# Altium PCB LCD_PCB_LAYOUT.PcbDoc
Units mm, origin at the board's own origin, x right, y up, seen from the top; angles counter-clockwise.
Board outline 80.1 x 67.6 mm, 2 copper layers (Top Layer, Bottom Layer); 26 components, 24 nets, 94 pads, 0 vias.
Unrouted connection lines stored in the file: 8.
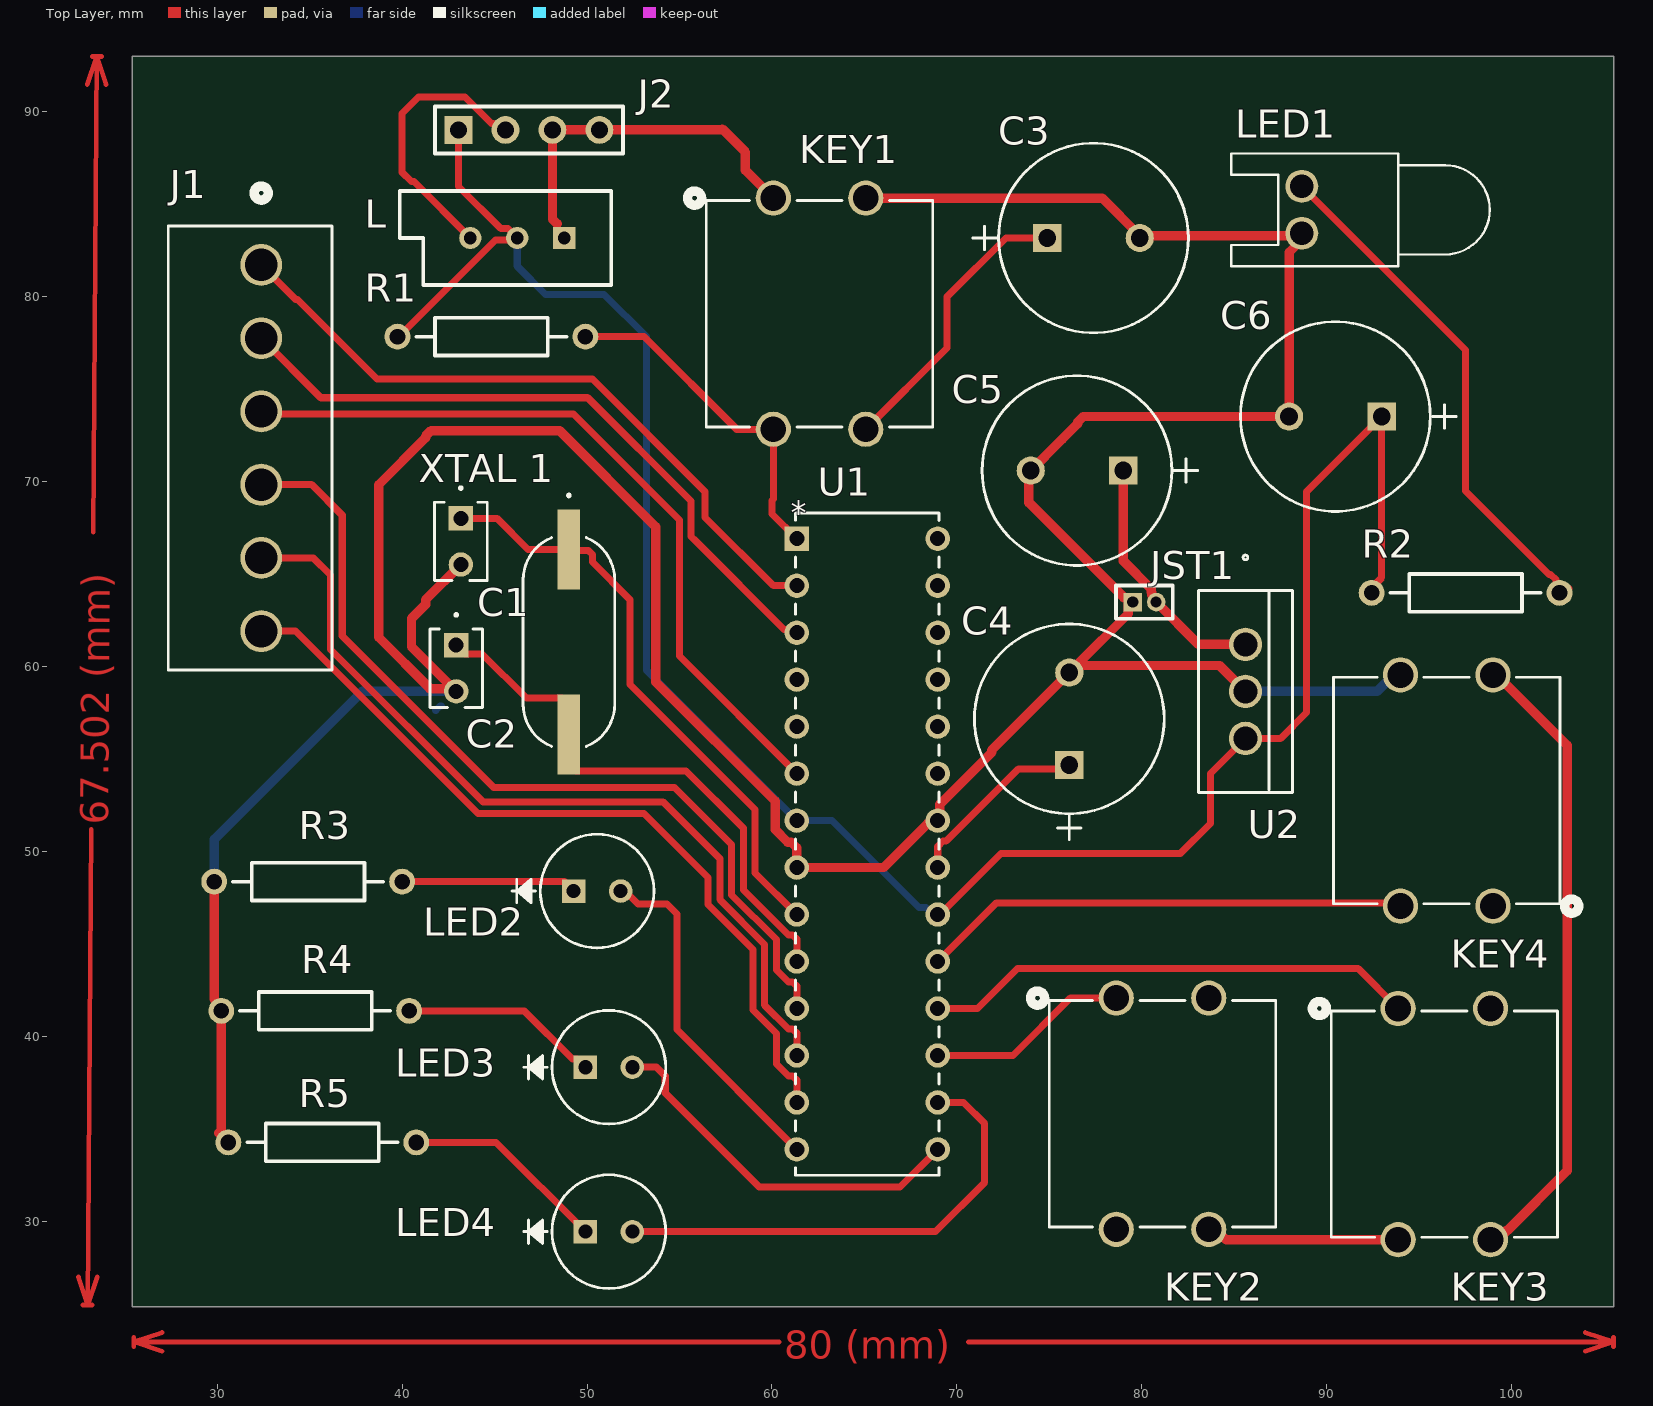
[diagram p0: Top Layer view]
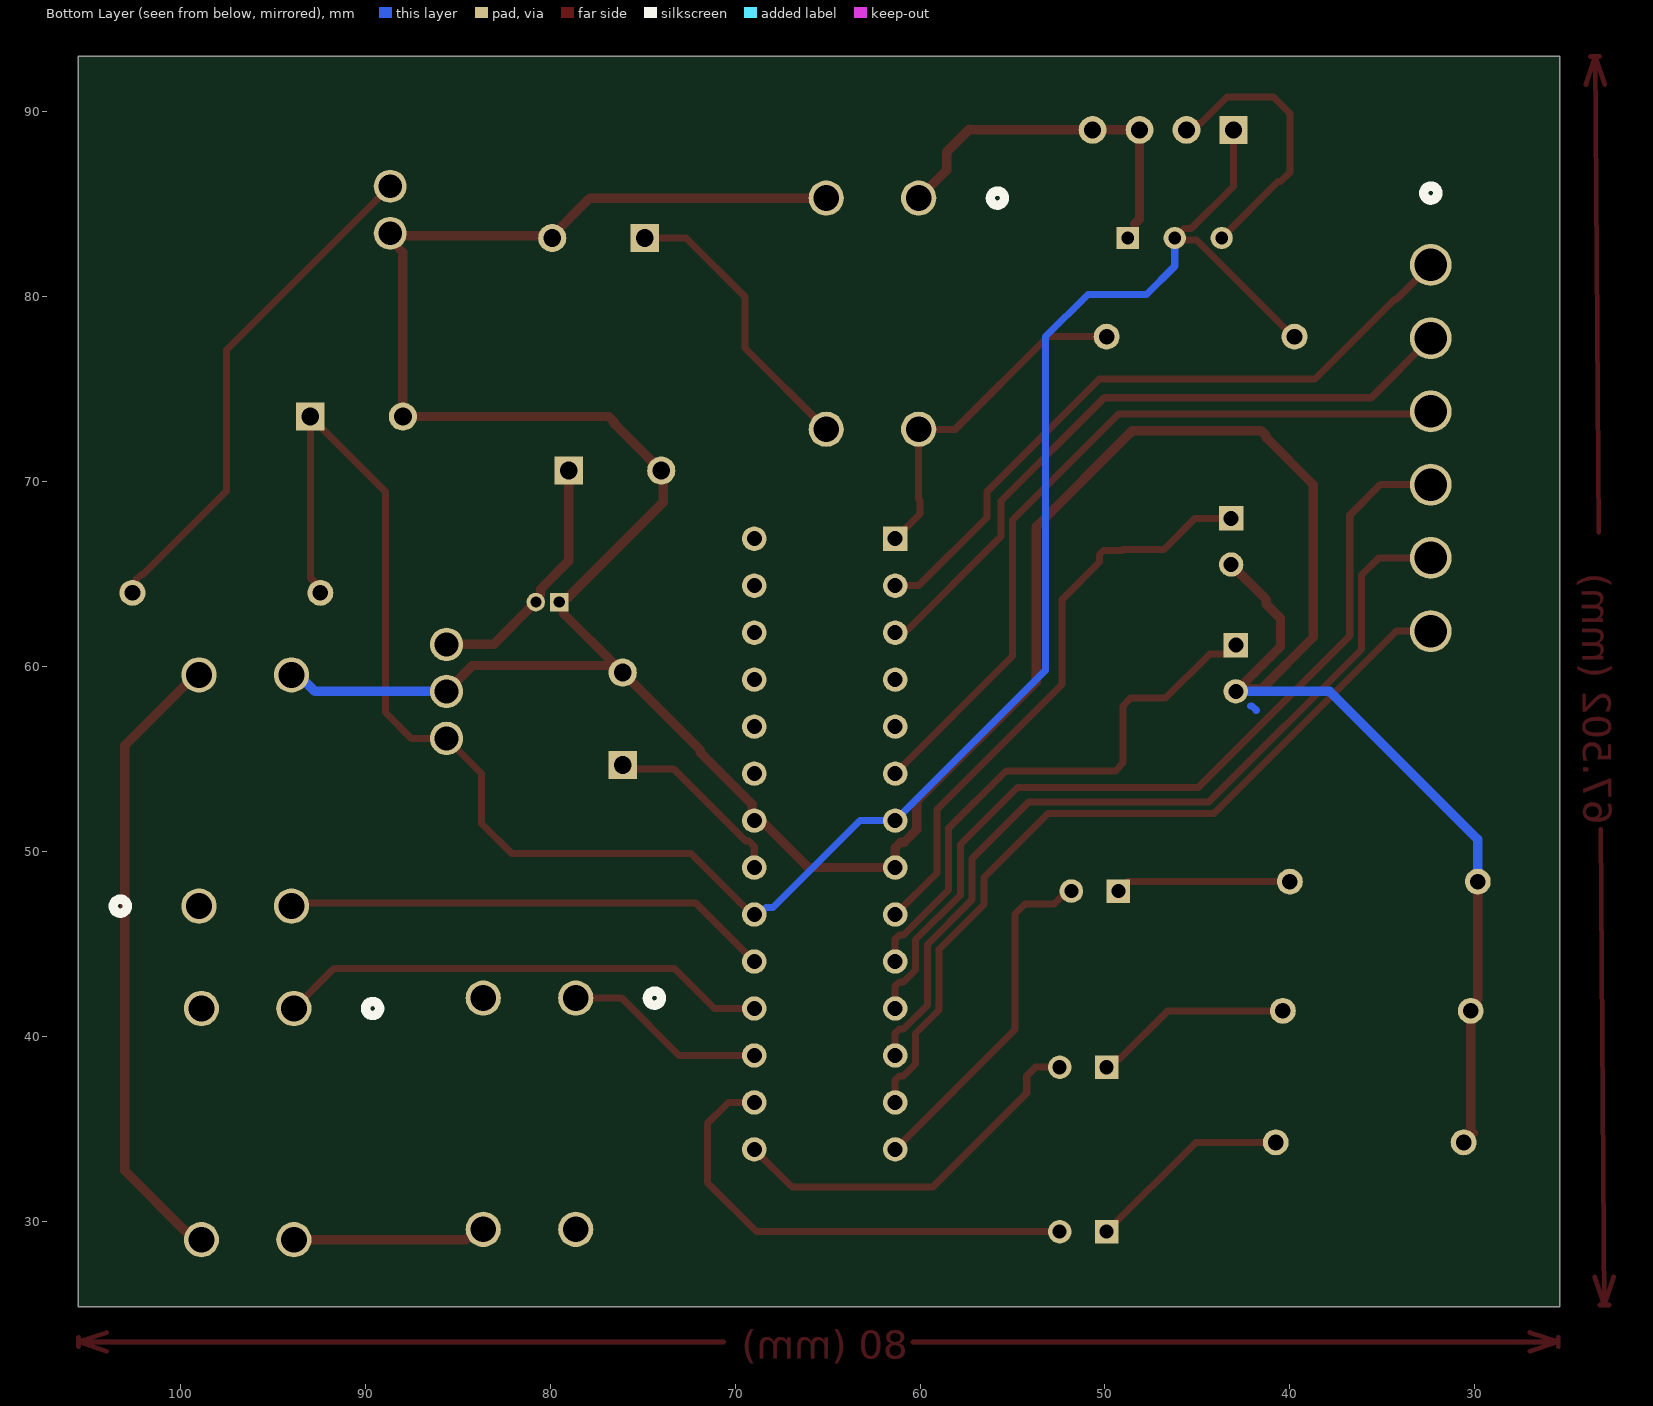
[diagram p1: Bottom Layer view, seen from below]

## Layer stack, top to bottom
Top Solder: solder mask 0.0102, Solder Resist, Dk 3.5
Top Layer: signal copper 0.0356
Dielectric 1: dielectric 0.32, FR-4, Dk 4.8
Bottom Layer: signal copper 0.0356
Bottom Solder: solder mask 0.0102, Solder Resist, Dk 3.5

## Board outline
25.4,25.4 105.5,25.4 105.5,93 25.4,93

## Design rules (kind name [scope] priority, off if disabled: settings)
Clearance [All] p1: gap=0.254 ignorepadtopadclearanceinfootprint=FALSE except(0: Arc-Hole Track-Hole SMDPad-Hole THPad-Hole Via-Hole Fill-Hole Poly-Hole Region-Hole Text-Hole)
PolygonConnect [All] p1: connectstyle=Relief reliefconductorwidth=0.254 reliefentries=4 polygonreliefangle="90 Angle" airgapwidth=0.254
RoutingVias [All] p1: holewidth=0.711 width=1.27 viastyle="Through Hole" minholewidth=0.711 minwidth=1.27 maxholewidth=4 maxwidth=5
SolderMaskExpansion [All] p1: expansion=0.102 istentingtop=FALSE
Width Width_1 [InNet('GND') or InNet('VCC')] p1: maxlimit=0.635 minlimit=0.381 preferedwidth=0.508
Width [All] p2: maxlimit=0.508 minlimit=0.254 preferedwidth=0.381
30 further rules are at their usual default settings.

## Components (designator, comment, footprint, x,y, rotation, side; value= is the part's Value field where it differs from the comment)
C1 "22pF" CAP_K220J15C0GF53L2_VIS 43.18,68.032 r270 top
C2 "22pF" CAP_K220J15C0GF53L2_VIS 42.926,61.174 r270 top
C3 "100nF" PCAP_10x16_PAN 74.879,83.185 r0 top
C4 "100nF" PCAP_10x16_PAN 76.073,54.686 r90 top
C5 "330nF" PCAP_10x16_PAN 78.994,70.612 r180 top
C6 "100nF" PCAP_10x16_PAN 92.964,73.533 r180 top
J1 "6 pin female connector" CONN6_1744055-6 32.385,81.73 r270 top
J2 "4 pin connector" HDR1X4 43.053,89.027 r0 top
JST1 "" MHDR1X2 79.502,63.5 r0 top
KEY1 "RESET" TL1100F 60.071,85.344 r0 top
KEY2 "RED" TL1100F 78.613,42.091 r0 top
KEY3 "BLUE" TL1100F 93.853,41.529 r0 top
KEY4 "GREEN" TL1100F 98.98,47.063 r180 top
L "RPot" VR5 46.228,83.185 r180 top value=1K
LED1 "5mm LED" LED-0 88.646,84.709 r90 top
LED2 "red_led" LED_SSL-LX5093BID_LUM 49.276,47.879 r0 top
LED3 "blue_led" LED_SSL-LX5093BID_LUM 49.911,38.354 r0 top
LED4 "green_led" LED_SSL-LX5093BID_LUM 49.911,29.464 r0 top
R1 "10K" AXIAL-0.4 44.831,77.851 r180 top
R2 "330K" AXIAL-0.4 97.5,64 r0 top
R3 "10K" AXIAL-0.4 34.925,48.387 r0 top
R4 "10K" AXIAL-0.4 35.306,41.402 r0 top
R5 "10K" AXIAL-0.4 35.687,34.29 r0 top
U1 "ATMEGA328-PU" 28P3_SPDIP28_SP_MCH 61.341,66.929 r0 top
U2 "7805" TO-220_FAS 85.598,61.214 r270 top
"XTAL 1" "16MHz" SMD_ABLS_11P4X4P7_ABR 49.022,61.341 r270 top

## Footprints (in the part's own frame and the unit in brackets; to place one, negate y for a bottom-side part, rotate by r counter-clockwise, add the part's x,y. Pads: shape width x height; smd on the part's side, far side on the other; paste and mask are expansions set on the pad)
28P3_SPDIP28_SP_MCH [mil]
  rect 52x52 hole 32 mask+0: 1(0,0)
  round 52 hole 32 mask+0: 2(0,-100) 3(0,-200) 4(0,-300) 5(0,-400) 6(0,-500) 7(0,-600) 8(0,-700) 9(0,-800) 10(0,-900) 11(0,-1000) 12(0,-1100) 13(0,-1200) 14(0,-1300) 15(300,-1300) 16(300,-1200) 17(300,-1100) 18(300,-1000) 19(300,-900) 20(300,-800) 21(300,-700) 22(300,-600) 23(300,-500) 24(300,-400) 25(300,-300) 26(300,-200) 27(300,-100) 28(300,0)
  silkscreen extent -2,-1355 302,55, body extent 0,0 10,10, height 10
AXIAL-0.4 [mm] "Axial Device, Thru-Hole; 2 Leads; 0.4 in Pin Spacing"
  round 1.4 hole 0.85: 1(-5.08,0) 2(5.08,0)
  silkscreen extent -4.06,-1.02 4.06,1.02
CAP_K220J15C0GF53L2_VIS [mil]
  rect 52x52 hole 32 mask+0: 1(0,0)
  round 52 hole 32 mask+0: 2(98.43,0)
  silkscreen extent -67,-56 133,56, body extent 0,0 10,10, height 10
CONN6_1744055-6 [mil]
  round 89 hole 69 mask+0: 1(0,0) 2(155.91,0) 3(311.81,0) 4(467.72,0) 5(623.62,0) 6(779.53,0)
  silkscreen extent -168,-198 862,151, body extent 0,0 10,10, height 10
HDR1X4 [mm] "Connector; Header; 4 Position"
  rect 1.5x1.5 hole 0.9: 1(0,0)
  round 1.5 hole 0.9: 2(2.54,0) 3(5.08,0) 4(7.62,0)
  silkscreen extent -1.27,-1.27 8.89,1.27
LED-0 [mil] "LED; 2 Leads"
  round 70 hole 50: 1(50,0) 2(-50,0)
  silkscreen extent -120,-400 120,150
LED_SSL-LX5093BID_LUM [mil]
  rect 50x50 hole 30 mask+0: 1(0,0)
  round 50 hole 30 mask+0: 2(100,0)
  silkscreen extent -131,-121 171,121, body extent 0,0 10,10, height 10
MHDR1X2 [mm] "Connector; Header; 2 Position"
  rect 1x1 hole 0.6: 1(0,0)
  round 1 hole 0.6: 2(1.27,0)
  silkscreen extent -0.9,-0.9 2.17,0.9
PCAP_10x16_PAN [mil]
  rect 60x60 hole 38 mask+0: 1(0,0)
  round 60 hole 38 mask+0: 2(197,0)
  silkscreen extent -158,-202 300,202, body extent 0,0 10,10, height 10
SMD_ABLS_11P4X4P7_ABR [mm]
  rect 4.312x1.213 smd paste+0 mask+0: 1(-4.999,0) 2(4.999,0)
  silkscreen extent -8,-2.48 5.64,2.48, body extent 0,0 0.25,0.25, height 0.25
TL1100F [mm]
  round 1.905 hole 1.397 mask+0: 1(0,0) 2(0,-12.5) 3(5,0) 4(5,-12.5)
  silkscreen extent -4.64,-12.37 8.62,0.38, body extent 0,0 0.25,0.25, height 0.25
TO-220_FAS [mil]
  round 71 hole 51 mask+0: 1(0,0) 2(100,0) 3(200,0)
  silkscreen extent -190,-100 315,100, body extent 0,0 10,10, height 10
VR5 [mm] "Thru-Hole; 3 Leads"
  rect 1.2x1.2 hole 0.7: 1(-2.54,0)
  round 1.2 hole 0.7: 2(0,0) 3(2.54,0)
  silkscreen extent -5.08,-2.54 6.35,2.54

## Part data
C1 C2: library part K220J15C0GF53L2, "No Description Available", Built_By=EMA_Cory, Copyright="Copyright (C) 2018 Accelerated Designs. All rights reserved", Datasheet=https://www.mouser.com/datasheet/2/427/kseries-1763315.pdf, Manufacturer_Part_Number=K220J15C0GF53L2, RefDes=RefDes, SourceLibrary=Vishay_2020-06-24, Type=DEV, Vendor=Vishay
C3 C4 C5 C6: library part ECA2GM4R7, "No Description Available", Built_By=EMA_UL_Team, Copyright="Copyright (C) 2018 Accelerated Designs. All rights reserved", Manufacturer_Part_Number=ECA2GM4R7, RefDes=RefDes, SourceLibrary=Panasonic_2011-12-05_Caps_NHG, Type=DEV, Vendor=Panasonic
J1: library part 1744055-6, "3.96 EP HDR ASSY 6P VERT HT", Built_By=EMA_UL_Team, Copyright="Copyright (C) 2016 Accelerated Designs. All rights reserved", Datasheet=https://www.te.com/commerce/DocumentDelivery/DDEController?Action=srchrtrv&DocNm=1744055&DocType=Customer+Drawing&DocLang=English&DocFormat=pdf&PartCntxt=1744055-2, Manufacturer_Part_Number=1744055-6, PITCH(MM)=3.96, POSITIONS=6, PRODUCT=Connector, RefDes=RefDes, ROWS/CONFIG=1, SourceLibrary=TE_Connectivity_250_Part_Delivery_6_2018-09-18, TE_Part_Number=1744055-6, Type=DEV, Vendor="TE Connectivity"
J2: library part "Header 4", "Header, 4-Pin", LatestRevisionDate=17-Jul-2002, LatestRevisionNote="Re-released for DXP Platform.", Publisher="Altium Limited"
JST1: library part MHDR1X2, "Header, 2-Pin", LatestRevisionDate=17-Jul-2002, LatestRevisionNote="Re-released for DXP Platform.", Publisher="Altium Limited"
KEY1 KEY2 KEY3 KEY4: library part TL1100FF160Q, "No Description Available", Built_By=EMA_Cory, Copyright="Copyright (C) 2018 Accelerated Designs. All rights reserved", Datasheet=https://sten-eswitch-13110800-production.s3.amazonaws.com/system/asset/product_line/data_sheet/143/TL1100.pdf, Manufacturer_Part_Number=TL1100FF160Q, RefDes=RefDes, SourceLibrary=E-Switch_2020-03-31, Type=DEV, Vendor=E-Switch
L: "Potentiometer", LatestRevisionDate=17-Jul-2002, LatestRevisionNote="Re-released for DXP Platform.", PackageDescription="Variable Resistor, Thru-Hole; 3 Leads", PackageReference=VR5, Published=8-Jun-2000, Publisher="Altium Limited", Set Position=0.5, Sim Note="Enter the Resistance value and the set point into parameter fields."
LED1: library part LED0, "Typical INFRARED GaAs LED", LatestRevisionDate=08-Jul-2005, LatestRevisionNote="Mech Layer 1 removed.", PackageDescription="LED; 2 Leads", PackageReference=LED-0, Published=8-Jun-2000, Publisher="Altium Limited"
LED2 LED3 LED4: library part SSL-LX5093BID, "No Description Available", Built_By=EMA_Cory, Copyright="Copyright (C) 2018 Accelerated Designs. All rights reserved", Datasheet=https://www.mouser.com/datasheet/2/244/SSL-LX5093BID-1137540.pdf, Manufacturer_Part_Number=SSL-LX5093BID, RefDes=RefDes, SourceLibrary=Add_to_database_2021-04-19, Type=DEV, Vendor=Lumex
R1 R2 R3 R4 R5: library part Res2, "Resistor", LatestRevisionDate=17-Jul-2002, LatestRevisionNote="Re-released for DXP Platform.", PackageDescription="Axial Device, Thru-Hole; 2 Leads; 0.4 in Pin Spacing", PackageReference=AXIAL-0.4, Published=8-Jun-2000, Publisher="Altium Limited"
U1: library part ATMEGA328-PU_1, "No Description Available", Built_By=EMA_Cory, Copyright="Copyright (C) 2018 Accelerated Designs. All rights reserved", Datasheet=https://ww1.microchip.com/downloads/en/DeviceDoc/ATmega48A-PA-88A-PA-168A-PA-328-P-DS-DS40002061B.pdf, Manufacturer_Part_Number=ATMEGA328-PU, RefDes=RefDes, SourceLibrary=Update_to_database_2021-05-13, Type=DEV, Vendor=Microchip
U2: library part LM7805CT, "No Description Available", Built_By=EMA_UL_Team, Copyright="Copyright (C) 2018 Accelerated Designs. All rights reserved", Manufacturer_Part_Number=LM7805CT, RefDes=RefDes, SourceLibrary=Fairchild_2008-01-01_, Type=DEV, Vendor="Fairchild Semiconductor"
"XTAL 1": library part ABLS-16.000MHZ-B4-T, "No Description Available", Built_By=EMA_Anthony, Copyright="Copyright (C) 2018 Accelerated Designs. All rights reserved", Datasheet=https://abracon.com/Resonators/abls.pdf, Manufacturer_Part_Number=ABLS-16.000MHZ-B4-T, RefDes=RefDes, SourceLibrary=Add_to_database_2021-04-09, Type=DEV, Vendor=Abracon

## Nets (pads, with @x,y where several pads share a name; then routed paths per layer and width w, separated by ;. In a path a pad name is that pad's centre, name@x,y a point inside that pad or via, vN(x,y) a via of type N, cw(c..) or ccw(c..) an arc to the next point about the centre after c; other vN are vias at no path point)
+5: C6.1 J2.1 L.2 R1.2 R2.1 U1.7 U1.20 U2.3 | length 119.3
  Top Layer w0.381: R1.2 39.831,77.851 45.056,83.076 46.119,83.076 L.2 45.72,83.693 45.339,83.693 43.053,85.979 J2.1 ; U1.20 69.088,46.609 72.39,49.911 82.073,49.911 83.699,51.538 83.699,54.235 U2.3 87.503,56.134 88.9,57.531 88.9,69.469 C6.1 92.964,64.82 92.42,64.276 R2.1
  Bottom Layer w0.381: L.2@45.974,83.439 L.2 46.228,81.661 47.752,80.137 50.927,80.137 53.213,77.851 53.213,59.817 U1.7 63.246,51.689 67.945,46.99 68.326,46.99 68.707,46.609 U1.20
BLUE_BUTTON: KEY3.1 KEY3.3 U1.18 | length 27.4
  Top Layer w0.381: U1.18 71.12,41.529 73.279,43.688 91.694,43.688 KEY3.1 93.853,42.037 KEY3.1@93.726,42.164
BLUE_LED: LED3.2 U1.15 | length 20.6
  Top Layer w0.381: LED3.2 53.752,38.354 54.229,37.877 54.229,36.957 59.309,31.877 66.929,31.877 U1.15
D4: J1.3 U1.6 | length 41.4
  Top Layer w0.381: J1.3 32.535,73.66 49.276,73.66 54.991,67.945 54.991,60.579 U1.6
D5: J1.4 U1.11 | length 47.8
  Top Layer w0.381: J1.4 35.115,69.85 36.767,68.199 36.767,61.658 44.958,53.467 54.737,53.467 57.817,50.387 57.817,47.673 60.236,45.253 60.236,43.611 60.883,42.964 61.118,42.964 61.341,42.741 U1.11
D6: J1.5 U1.12 | length 46.4
  Top Layer w0.381: J1.5 35.202,65.89 36.131,64.96 36.131,60.945 44.372,52.705 54.102,52.705 57.182,49.625 57.182,47.41 59.601,44.99 59.601,41.706 60.883,40.424 61.118,40.424 61.341,40.201 U1.12
D7: J1.6 U1.13 | length 44
  Top Layer w0.381: J1.6 34.249,61.93 44.109,52.07 53.086,52.07 56.547,48.609 56.547,47.147 58.966,44.727 58.966,41.443 60.236,40.173 60.236,38.531 60.883,37.884 61.118,37.884 61.341,37.661 U1.13
E: J1.2 U1.3 | length 36.7
  Top Layer w0.381: J1.2 35.606,74.549 50.038,74.549 55.626,68.961 55.626,67.056 55.88,66.802 60.653,62.029 61.161,62.029 U1.3
GND: C1.2 C2.2 C3.2 C4.2 C5.2 C6.2 J2.3 J2.4 JST1.1 KEY1.1 KEY1.3 KEY2.2 KEY2.4 KEY3.2 KEY3.4 KEY4.2 KEY4.4 L.1 LED1.2 R3.1 R4.1 R5.1 U1.8 U1.22 U2.2 | length 261.8
  Top Layer w0.508: R3.1 29.845,42.024 30.226,41.643 R4.1 30.226,34.925 30.099,34.798 ; C2.2 C2.2@42.774,58.826 ; C1.2 41.275,63.627 41.275,63.373 40.513,62.611 40.513,61.087 C2.2@42.774,58.826 ; 48.387,83.947 48.133,84.201 J2.3 J2.4 57.277,89.027 57.321,89.071 58.562,87.829 58.562,86.853 KEY1.1 ; KEY1.3 77.851,85.344 79.883,83.312 C3.2 80.01,83.312 88.519,83.312 LED1.2 88.646,83.095 87.96,82.41 C6.2 76.825,73.533 76.527,73.235 76.527,73.149 75.692,72.314 73.892,70.513 73.892,68.882 79.028,63.746 79.256,63.746 79.256,62.873 C4.2@76.454,60.071 ; KEY2.4 83.991,29.591 84.553,29.029 KEY3.2 ; U2.2 84.201,60.071 C4.2@76.454,60.071 ; KEY3.4 99.231,29.029 99.732,29.53 99.761,29.53 102.997,32.766 102.997,55.753 99.187,59.563 KEY4.2 ; C2.2@42.774,58.826 41.504,58.826 38.735,61.595 38.735,69.85 41.275,72.39 41.275,72.473 41.573,72.771 48.514,72.771 53.721,67.564 53.721,59.182 60.173,52.73 60.173,51.205 60.857,50.521 61.043,50.521 61.341,50.223 U1.8 66.04,49.149 68.424,51.533 68.805,51.533 69.078,51.806 69.078,52.568 71.882,55.372 71.882,55.499 C4.2@76.454,60.071
  Bottom Layer w0.508: R3.1 29.845,50.673 37.846,58.674 C2.2 ; U2.2 92.713,58.674 93.602,59.563 KEY4.4
GREEN_BUTTON: KEY4.1 KEY4.3 U1.19 | length 26.4
  Top Layer w0.381: U1.19 72.136,47.244 93.799,47.244 KEY4.3
GREEN_LED: LED4.2 U1.16 | length 26.3
  Top Layer w0.381: LED4.2 68.834,29.464 71.501,32.131 71.501,35.306 70.358,36.449 U1.16
NetC1_1: "XTAL 1.1" C1.1 U1.9 | length 32
  Top Layer w0.381: C1.1 45.125,68.032 46.817,66.34 49.022,66.34 49.068,66.294 50.069,66.294 50.292,66.071 50.292,65.659 52.324,63.627 52.324,59.055 58.007,53.372 59.087,52.292 59.087,48.863 U1.9
NetC2_1: "XTAL 1.2" C2.1 U1.10 | length 30
  Top Layer w0.381: C2.1 43.396,60.704 44.325,60.704 46.722,58.307 48.606,58.307 49.022,57.891 49.022,56.342 49.022,54.793 49.438,54.377 55.351,54.377 58.452,51.276 58.452,47.936 60.883,45.504 61.118,45.504 61.341,45.281 U1.10
NetC3_1: C3.1 KEY1.2 KEY1.4 R1.1 U1.1 | length 34.4
  Top Layer w0.381: R1.1 53.086,77.851 58.093,72.844 KEY1.2 60.071,69.071 60,69 60,68.27 U1.1 ; KEY1.4 69.469,77.242 69.469,80.01 72.644,83.185 C3.1
NetC4_1: C4.1 U1.21 | length 10.1
  Top Layer w0.381: U1.21 68.961,50.292 69.253,50.584 69.419,50.584 73.318,54.483 75.87,54.483 C4.1
NetJ2_2: J2.2 L.3 | length 15
  Top Layer w0.381: L.3 40.64,86.233 40.513,86.233 40.005,86.741 40.005,89.916 40.894,90.805 43.404,90.805 44.248,89.961 44.834,89.375 44.942,89.375 45.29,89.027 J2.2
NetLED1_1: LED1.1 R2.2 | length 28.4
  Top Layer w0.381: LED1.1 97.5,77.125 97.5,69.5 102,65 102.097,65 102.385,64.712 102.385,64.195 R2.2 102.856,64 103.079,64.223 R2.2@103.088,64.223
NetLED2_1: LED2.1 R3.2 | length 9.5
  Top Layer w0.381: R3.2 48.768,48.387 LED2.1
NetLED3_1: LED3.1 R4.2 | length 10.8
  Top Layer w0.381: R4.2 46.609,41.402 49.212,38.798 49.466,38.798 LED3.1
NetLED4_1: LED4.1 R5.2 | length 11.1
  Top Layer w0.381: R5.2 45.085,34.29 LED4.1
RED_BUTTON: KEY2.1 KEY2.3 U1.17 | length 10.9
  Top Layer w0.381: U1.17 73.025,38.989 76.127,42.091 KEY2.1
RED_LED: LED2.2 U1.14 | length 19
  Top Layer w0.381: LED2.2 52.057,47.879 52.765,47.17 54.334,47.17 54.864,46.64 54.864,40.386 U1.14
RS: J1.1 U1.2 | length 37
  Top Layer w0.381: J1.1 34.25,79.865 34.343,79.865 38.642,75.565 50.292,75.565 56.388,69.469 56.388,68.072 60.071,64.389 U1.2
VCC: C5.1 JST1.2 U2.1 | length 13.6
  Top Layer w0.508: C5.1 78.994,67.758 79,67.752 79,65.72 80.51,64.21 80.51,64.044 80.526,64.028 80.526,63.879 80.772,63.633 JST1.2 83.058,61.214 U2.1
pads on no net: U1.4 U1.5 U1.23 U1.24 U1.25 U1.26 U1.27 U1.28
copper on no net: | length 136.6
  Top Layer w0.254: 22.503,27.028 23,25.5 ; 22.746,25.502 23.254,25.498 ; 22.981,91.48 23.5,93 ; 23.191,51.226 23,25.5 ; 23.246,93.002 23.754,92.998 ; 23.309,67.274 23.5,93 ; 23.519,27.02 23,25.5 ; 23.997,91.472 23.5,93 ; 25.5,23.246 25.5,23.754 ; 27.024,22.992 25.5,23.5 ; 27.024,24.008 25.5,23.5 ; 60.396,23.5 25.5,23.5 ; 70.604,23.5 105.5,23.5 ; 103.976,22.992 105.5,23.5 ; 103.976,24.008 105.5,23.5 ; 105.5,23.246 105.5,23.754
  Bottom Layer w0.381: 41.821,57.631 41.821,57.67 42.044,57.893 42.145,57.893

## Other copper
Top Layer:
  text "67.502 (mm)" at 24.107,51.474 h1.52 r89.58
  text "80 (mm)" at 60.65,22.586 h1.52

## Text inside footprints (layer, text, board x,y; h text height)
U1: Top Overlay "*" at 61.023,67.716 h1.27; Mechanical 13 "*" at 61.341,66.294 h1.27
U2: Mechanical 13 "TAB" at 87.061,59.15 h0.64 r270